# Altium PCB BSE_PCB.PcbDoc
Units mm, origin at the board's own origin, x right, y up, seen from the top; angles counter-clockwise.
Board outline 61 x 42 mm, 2 copper layers (Top Layer, Bottom Layer), stack 1.671 mm thick; 4 components, 4 nets, 21 pads, 0 vias.
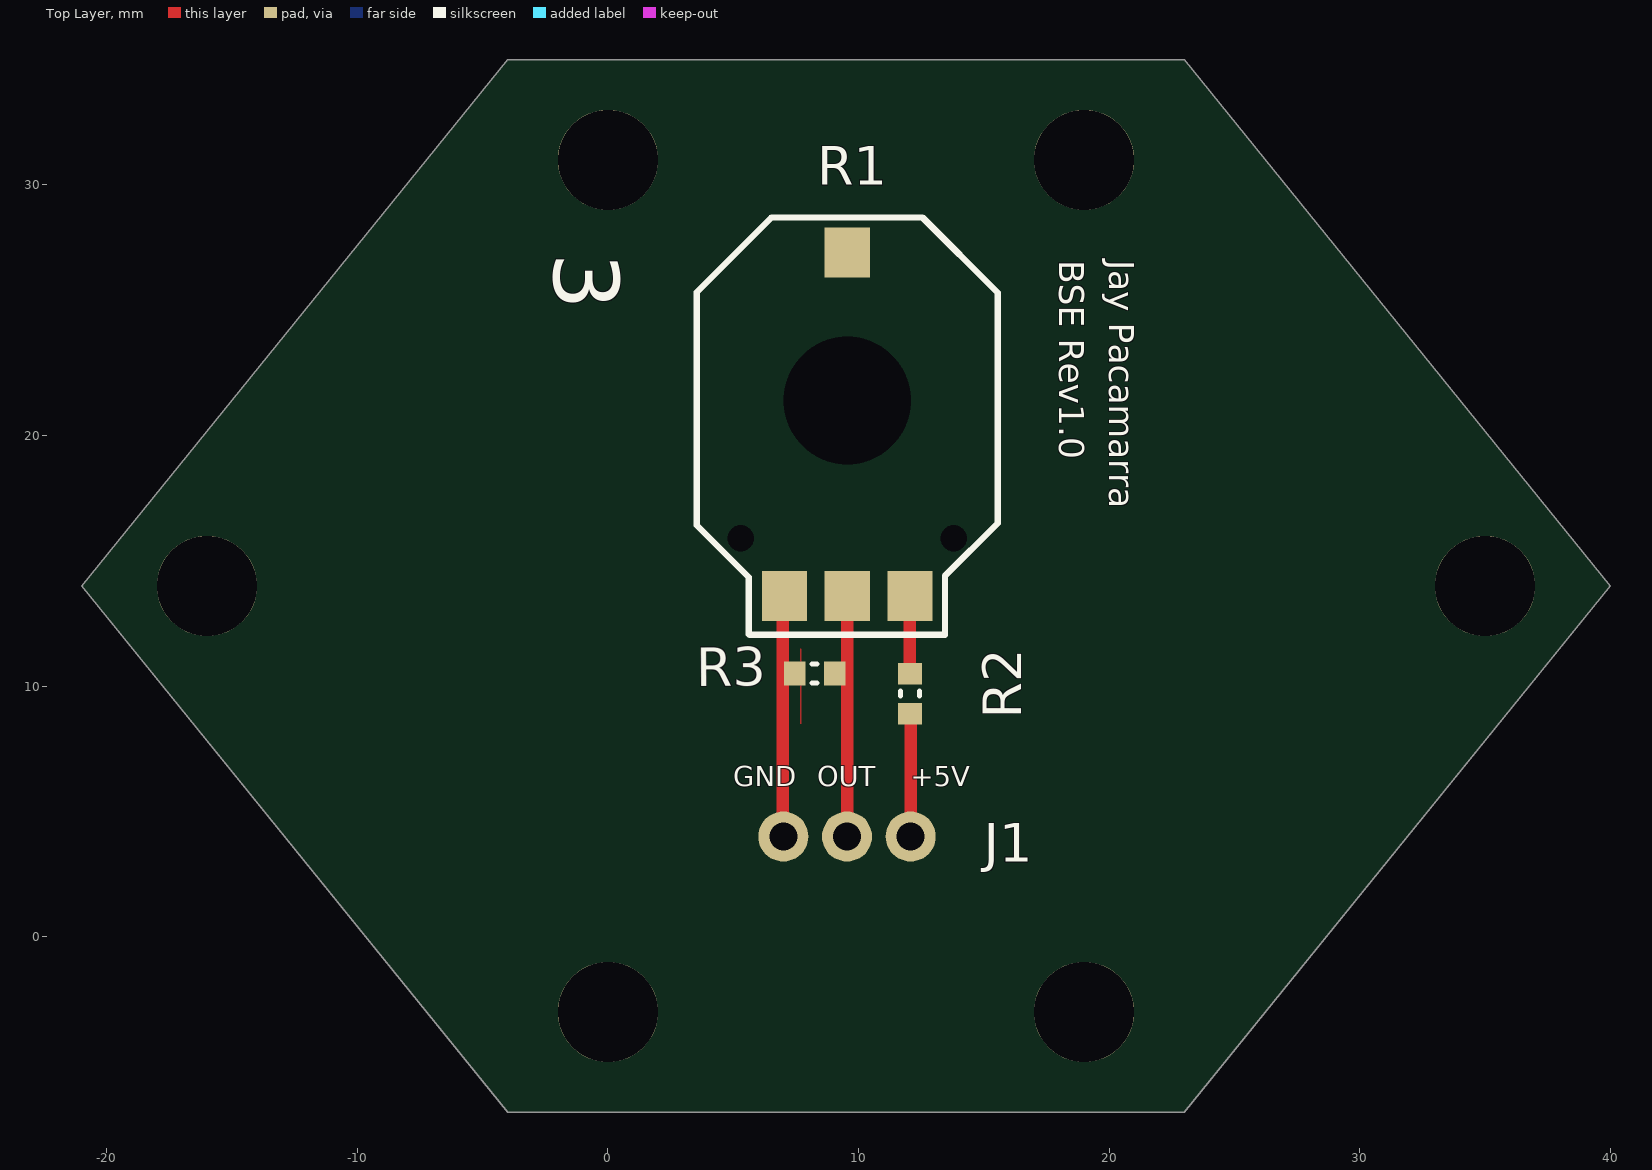
[diagram p0: Top Layer view]
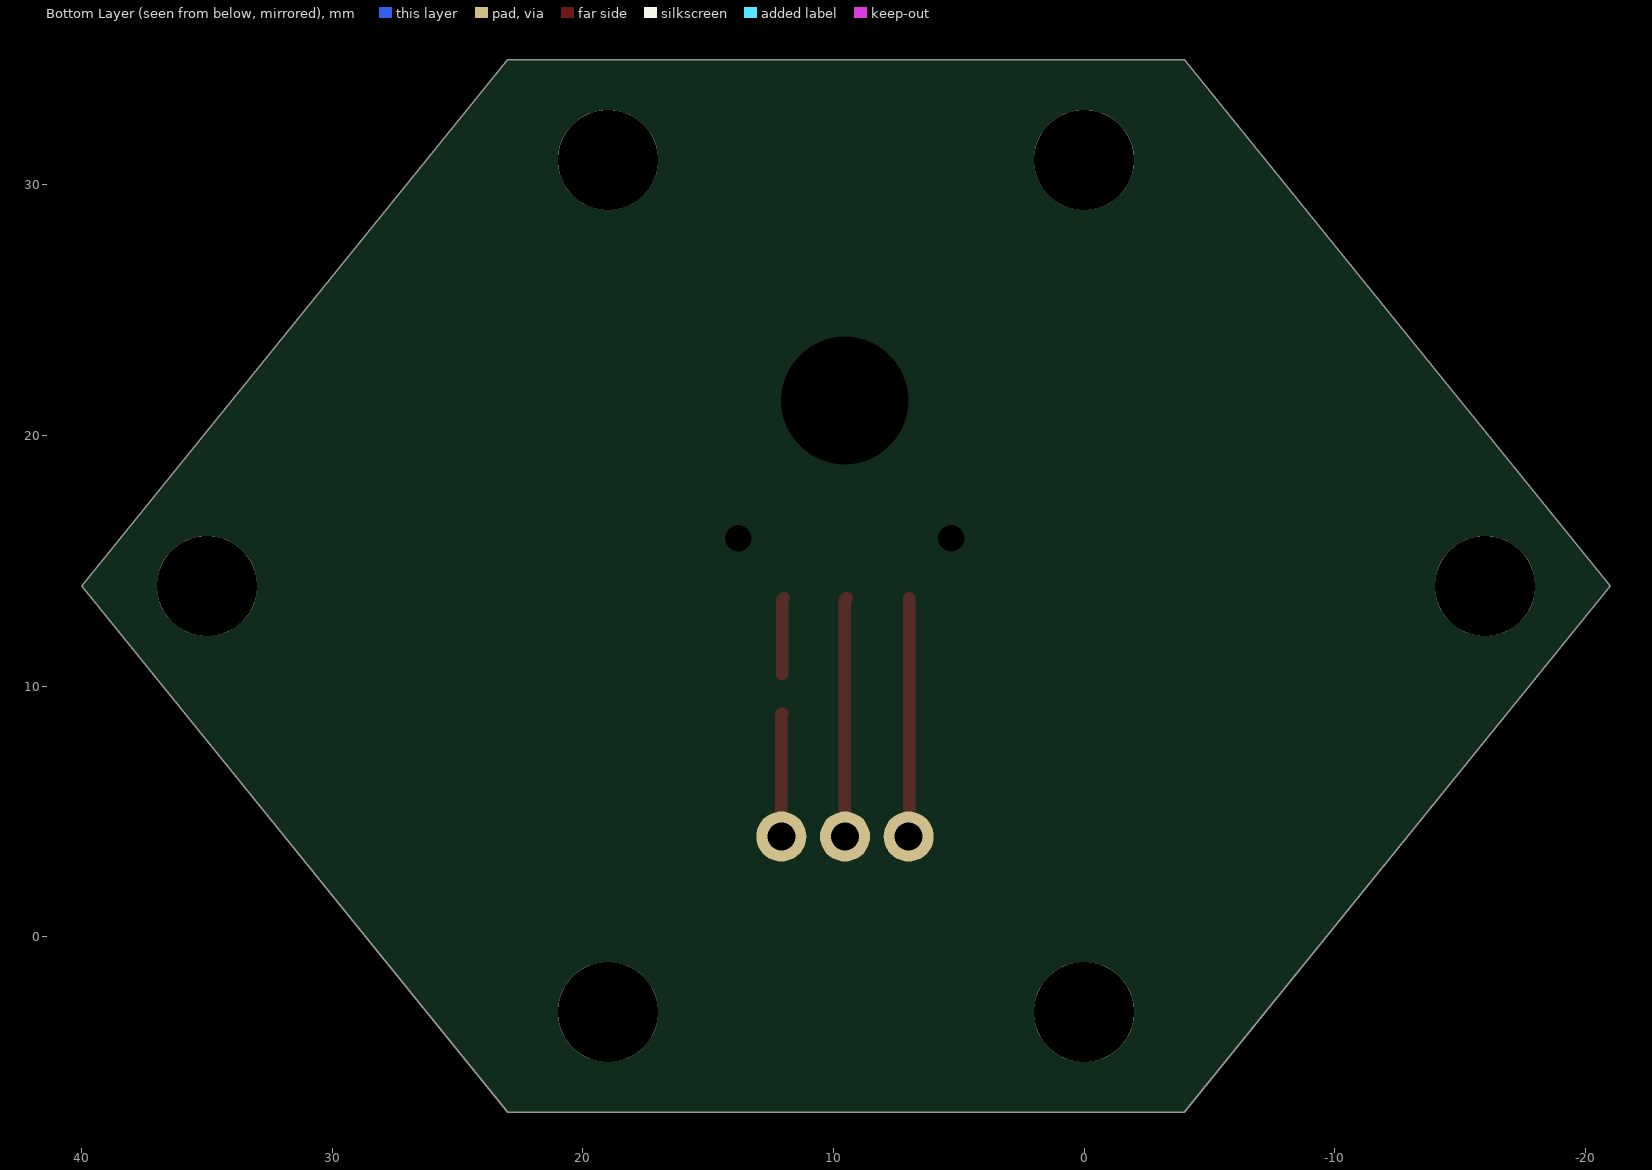
[diagram p1: Bottom Layer view, seen from below]
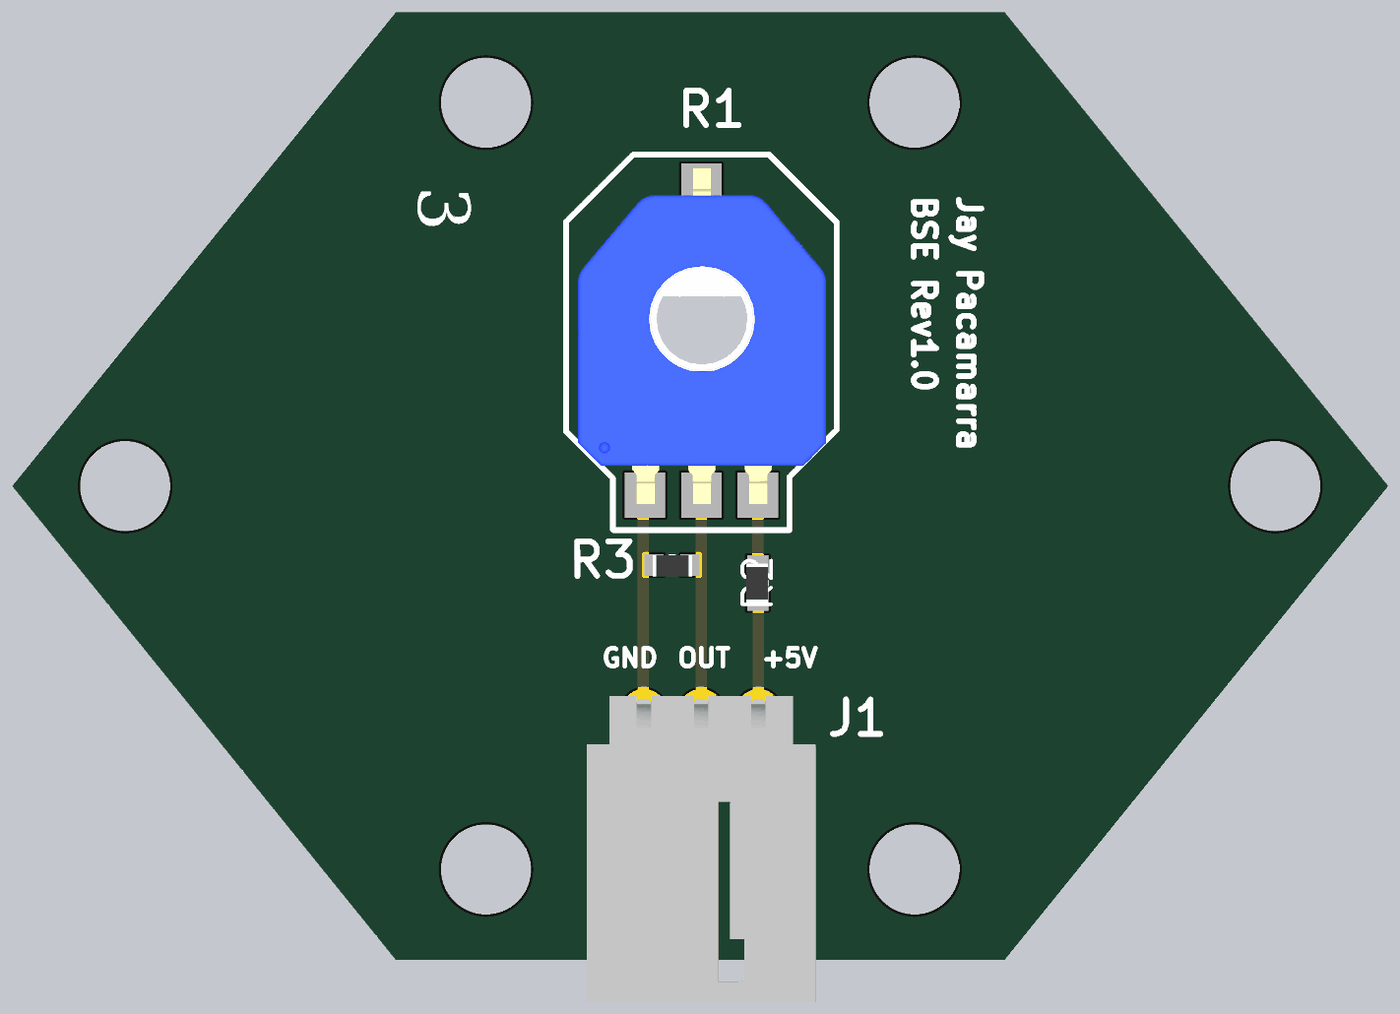
[diagram p2: 3D render of the assembled board from above, using the file's embedded part models]

## Layer stack, top to bottom
Top Solder: solder mask 0.0102, Solder Resist, Dk 3.5
Top Layer: signal copper 0.0356
Dielectric 1: dielectric 1.6, FR-4, Dk 4.8
Bottom Layer: signal copper 0.0356
Bottom Solder: solder mask 0.0102, Solder Resist, Dk 3.5

## Board outline
23,35 40,14 23,-7 -4,-7 -21,14 -4,35
cut-out: 23,35

## Design rules (kind name [scope] priority, off if disabled: settings)
Clearance [All] p1: gap=0.2 ignorepadtopadclearanceinfootprint=FALSE
HoleSize [All] p1: absolutevalues=TRUE maxlimit=6.3 minlimit=0.025 maxpercent=80.000 minpercent=20.000
MinimumSolderMaskSliver [All] p1: minsoldermaskwidth=0.15
PolygonConnect [All] p1: connectstyle=Relief reliefconductorwidth=0.254 reliefentries=4 polygonreliefangle="90 Angle" airgapwidth=0.254
RoutingVias [All] p1: holewidth=0.2 width=0.5 viastyle="Through Hole" minholewidth=0.2 minwidth=0.45 maxholewidth=0.3 maxwidth=0.6
SilkToSilkClearance [All] p1: silktosilkclearance=0.15
SilkToSolderMaskClearance [IsPad] p1: minsilkscreentomaskgap=0.15 clearancetoexposedcopper=TRUE
SolderMaskExpansion [All] p1: expansion=0.102
Width [All] p1: maxlimit=1 minlimit=0.127 preferedwidth=0.254
26 further rules are at their usual default settings.

## Components (designator, comment, footprint, x,y, rotation, side; value= is the part's Value field where it differs from the comment)
J1 "Sensor Header" 3PIN 7,4 r0 top
R1 "10k pot" "10k Rotary Encoder" 9.55,21.4 r0 top
R2 "1.1k" "RES 0603" 12.05,9.7 r270 top
R3 "2M" "RES 0603" 8.25,10.5 r0 top

## Footprints (in the part's own frame and the unit in brackets; to place one, negate y for a bottom-side part, rotate by r counter-clockwise, add the part's x,y. Pads: shape width x height; smd on the part's side, far side on the other; paste and mask are expansions set on the pad)
3PIN [mm]
  round 2 hole 1.11: 1(0,0) 2(2.54,0) 3(5.08,0)
  body extent -2.54,-12.89 7.62,0.7, height 7.06
"10k Rotary Encoder" [mm]
  round 0 hole 1.05 unplated: 0(-4.25,-5.5) 0(4.25,-5.5)
  round 0 hole 5.1 unplated: 0(0,0)
  rect 1.8x2 smd: 1(-2.5,-7.8) 2(0,-7.8) 3(2.5,-7.8) 4(0,5.9)
  silkscreen extent -6,-9.35 6,7.3, body extent -5.47,-8.2 5.53,6.7, height 2.16
"RES 0603" [mm] "Chip Resistor, 2-Leads, Body 1.60x0.85mm, IPC Medium Density"
  rect 0.85x0.95 smd: 1(-0.8,0) 2(0.8,0)
  silkscreen extent -0.1,-0.38 0.1,0.38, body extent -0.86,-0.51 0.89,0.44, height 0.55

## Part data
J1: library part 3PIN, "CONN HEADER R/A 3POS 2.54MM", Color=Black, Contact Resistance=30mR, Current Rating=3A, Flammability Rating="UL94 V-0", Insulation Resistance=1GR, Manufacturer=Molex, Manufacturer Part Number=70553-0002, Max Operating Temperature=105°C, Min Operating Temperature=-40°C, Package Quantity=2080, Supplier Part Number 1=WM4901-ND, Voltage Rating=250V, Approvals=UL,CSA, ComponentLink1Description=http://www.molex.com/webdocs/datasheets/pdf/en-us/0705530002_PCB_HEADERS.pdf?src-supplier=Avnet, ComponentLink1URL=http://www.molex.com/webdocs/datasheets/pdf/en-us/0705530002_PCB_HEADERS.pdf?src-supplier=Avnet, ComponentLink2Description=http://www.onlinecomponents.com/productFiles/mf-MOL/209530705530002_pcb_headers.pdf?src-supplier=Onlinecomponents.com, ComponentLink2URL=http://www.onlinecomponents.com/productFiles/mf-MOL/209530705530002_pcb_headers.pdf?src-supplier=Onlinecomponents.com, ComponentLink3Description=http://uk.rs-online.com/webdocs/1362/0900766b81362e0f.pdf?src-supplier=RSComponents, ComponentLink3URL=http://uk.rs-online.com/webdocs/1362/0900766b81362e0f.pdf?src-supplier=RSComponents, ComponentLink4Description=http://www.jameco.com/Jameco/Products/ProdDS/1933671.pdf?src-supplier=Jameco, ComponentLink4URL=http://www.jameco.com/Jameco/Products/ProdDS/1933671.pdf?src-supplier=Jameco, ComponentLink5Description=http://www.mouser.com/ds/2/276/0705530002_PCB_HEADERS-172778.pdf?src-supplier=Mouser, ComponentLink5URL=http://www.mouser.com/ds/2/276/0705530002_PCB_HEADERS-172778.pdf?src-supplier=Mouser, Contact Gender=Male, Contact Material="Bronze,Brass,Copper Alloy", Contact Plating=Gold, ELV=Compliant, Gender=Male, Glow Wire Compliant=Non-compliant, Housing Color=Black, Housing Material=Thermoplastic, Lead Free="Lead Free", Material=Brass, Mount="Through Hole", Number of Circuits=3, Number of Contacts=3, Number of Positions=3, Number of Rows=1, Orientation="Right Angle", Packaging=Rail/Tube, Pitch=2.54mm, Pricing 1="1=1.02, 10=0.893, 100=0.7702, 500=0.63018, 1000=0.56016, 5000=0.49014, 10000=0.46563 (USD)", Radiation Hardening=No, REACH SVHC=Unknown, Stock 1=2903, Supplier 1=Digi-Key, Termination=Solder, Voltage Rating (DC)=250V
R1: library part "10k rotary encoder", "Res Cermet Trimmer 10K Ohm 30% 1(Elec)/1(Mech)Turn 4mm (11 X 14.9 X 3.1mm) Gull Wing SMD T/R", Case/Package=SMD/SMT, Manufacturer=Murata, Manufacturer Part Number=SV01A103AEA01R00, Max Operating Temperature=85°C, Min Operating Temperature=-40°C, Package Quantity=1000, Resistance=10kR, Supplier Part Number 1=490-7023-1-ND, Temperature Coefficient=500ppm/°C, Tolerance=30%, Actuator Type="Hole for Shaft", ComponentLink1Description=http://www1.futureelectronics.com/doc/MURATA/SV01A103AEA01R00.pdf?src-supplier=Future+Electronics, ComponentLink1URL=http://www1.futureelectronics.com/doc/MURATA/SV01A103AEA01R00.pdf?src-supplier=Future+Electronics, ComponentLink2Description=https://www.murata.com/en-us/products/productdata/8796781117470/S0070E.pdf?src-supplier=Digi-Key, ComponentLink2URL=https://www.murata.com/en-us/products/productdata/8796781117470/S0070E.pdf?src-supplier=Digi-Key, ComponentLink3Description=http://www.murata.com/~/media/webrenewal/support/library/catalog/products/sensor/rotaryposition/r51e.ashx?src-supplier=Digi-Key, ComponentLink3URL=http://www.murata.com/~/media/webrenewal/support/library/catalog/products/sensor/rotaryposition/r51e.ashx?src-supplier=Digi-Key, ComponentLink4Description=http://uk.rs-online.com/webdocs/13ec/0900766b813ecb07.pdf?src-supplier=RSComponents, ComponentLink4URL=http://uk.rs-online.com/webdocs/13ec/0900766b813ecb07.pdf?src-supplier=RSComponents, Depth=14.9mm, Height=2.1mm, Lead Free="Lead Free", Length=11mm, Linearity=2%, Military Standard=Not, Mount="Surface Mount", Number of Turns=1, Packaging="Tape and Reel", Pricing 1="1=2.46, 5=2.328, 10=1.995, 25=1.596, 50=1.4628, 100=1.3299, 500=1.16366 (USD)", Sensing Method=Resistive, Stock 1=998, Supplier 1=Digi-Key, Termination="Gull Wing", Type=Potentiometer
R2: library part "RES 1.1k", "ERJPA3 Resistors 0.25W 0603 1K1 1%", Case/Package=0603, Case Code (Metric)=1608, Manufacturer=Panasonic, Manufacturer Part Number=ERJ-PA3F1101V, Max Operating Temperature=155°C, Max Power Dissipation=250mW, Min Operating Temperature=-55°C, Resistance=1.1kR, Supplier Part Number 1=P1.1KBYCT-ND, Temperature Coefficient=100ppm/°C, Tolerance=1%, Voltage Rating=150V, Case Code (Imperial)=0603, ComponentLink1Description=http://www.farnell.com/datasheets/1801181.pdf?src-supplier=Element14, ComponentLink1URL=http://www.farnell.com/datasheets/1801181.pdf?src-supplier=Element14, ComponentLink2Description=http://industrial.panasonic.com/cdbs/www-data/pdf/RDO0000/AOA0000C331.pdf?src-supplier=Farnell, ComponentLink2URL=http://industrial.panasonic.com/cdbs/www-data/pdf/RDO0000/AOA0000C331.pdf?src-supplier=Farnell, Composition="Thick Film", Depth=0.8mm, Features="Automotive AEC-Q200", Height=0.018inch, Length=0.063inch, Mount="Surface Mount", Number of Terminations=2, Packaging="Cut Tape", Power Rating=250mW, Pricing 1="1=0.13, 10=0.12, 100=0.0461, 1000=0.02028, 2500=0.01752 (USD)", REACH SVHC="No SVHC", Stock 1=10551, Supplier 1=Digi-Key, Termination=Solder, Voltage Rating (DC)=150V, Width=0.031inch
R3: library part "RES 2M", "Res Thick Film 0603 2MegaOhm 1% 1/4W ±100ppm/K Molded Paper T/R", Manufacturer=Vishay, Manufacturer Part Number=RCS06032M00FKEA, Supplier Part Number 1=541-RCS06032M00FKEACT-ND, Pricing 1="1=0.14, 10=0.123, 100=0.0472, 1000=0.02075, 2500=0.01792 (USD)", Stock 1=5000, Supplier 1=Digi-Key

## Free pads (board coordinates)
  round 0 hole 4 unplated: 1(19,31)
  round 4 hole 4 unplated: 1(19,31) 2(35,14) 3(19,-3) 4(0,-3) 5(-16,14) 6(0,31)

## Nets (pads, with @x,y where several pads share a name; then routed paths per layer and width w, separated by ;. In a path a pad name is that pad's centre, name@x,y a point inside that pad or via, vN(x,y) a via of type N, cw(c..) or ccw(c..) an arc to the next point about the centre after c; other vN are vias at no path point)
+5V: J1.3 R2.2 | length 4.9
  Top Layer w0.5: R2.2 12.08,8.87 J1.3
GND: J1.1 R1.1 R3.1 | length 9.5
  Top Layer w0.5: R1.1@6.975,13.5 6.975,4.025 J1.1
OUT: J1.2 R1.2 R3.2 | length 9.5
  Top Layer w0.5: R1.2@9.475,13.5 9.55,13.425 9.55,4.01 J1.2
vDIV: R1.3 R2.1 | length 3
  Top Layer w0.5: R1.3@11.975,13.5 12.05,13.425 R2.1
pads on no net: R1.0 R1.4

## Polygon pours and split planes (outlines as drawn)
GND on Top Layer "Top Layer-GND" (solid, pour order 2): 7.7,11.5 7.7,8.5 7.7,11.5
GND on Top Layer "Top Layer-GND 1" (solid, pour order 0): 6.2,10.75
GND on Bottom Layer "Bottom Layer-GND" (solid, pour order 10): 5,10.4
GND on Bottom Layer "Bottom Layer-GND 1" (solid, pour order 8): 4.9,11.1

## Silkscreen, mask and mechanical layers (free items; w line width, h text height)
Top Overlay:
  text "3" at -3,27.3 h4.5 r270
  text "BSE Rev1.0" at 18,27 h1 r270
  text "Jay Pacamarra" at 20,27 h1 r270
  text "GND" at 5,6 h0.8
  text "OUT" at 8.35,6 h0.8
  text "+5V" at 12.08,6 h0.8
Mechanical 13:
  the board outline again, w0.2